# EAGLE board InkTime (EAGLE 9.7.0)
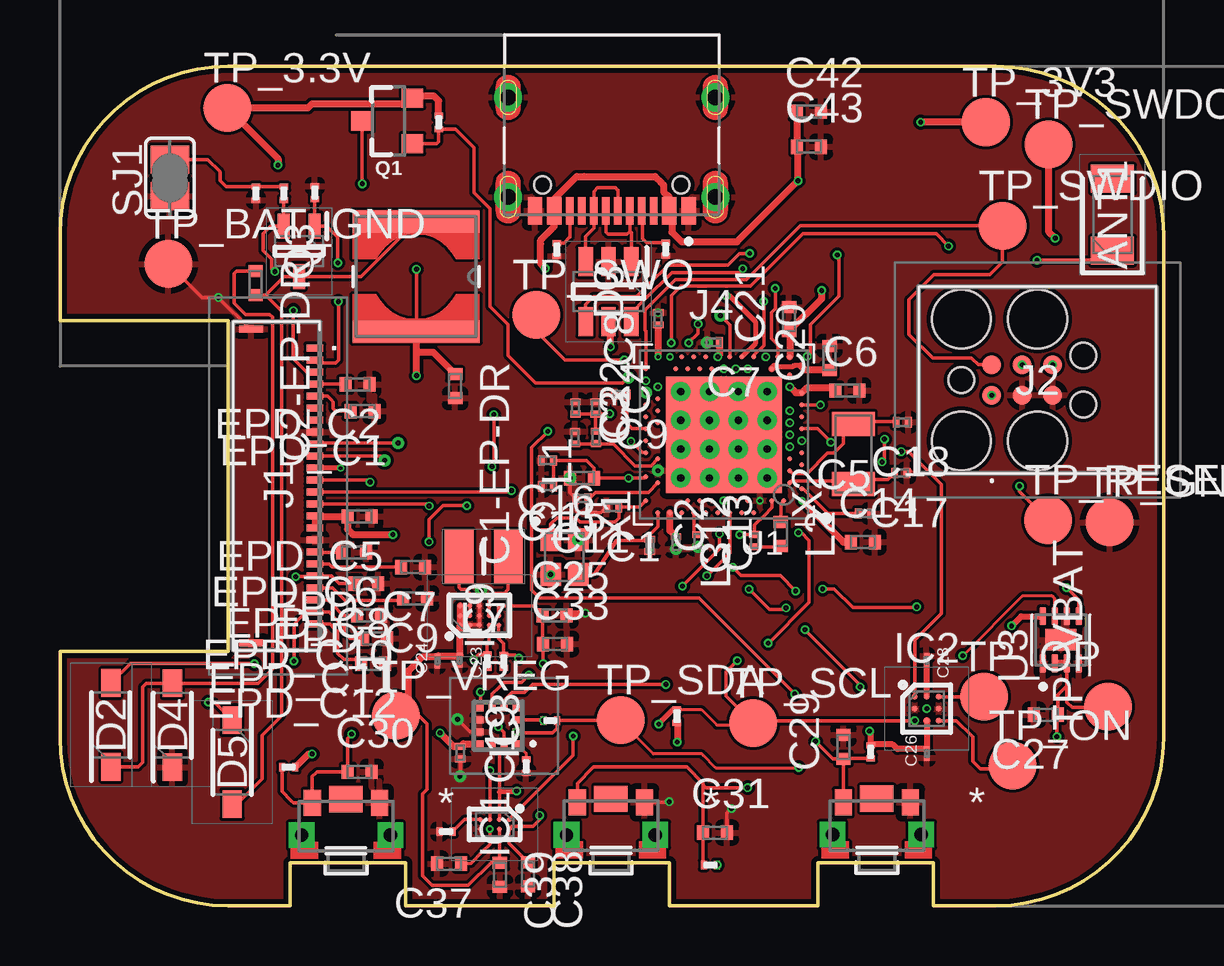
[diagram p0: board, top side]
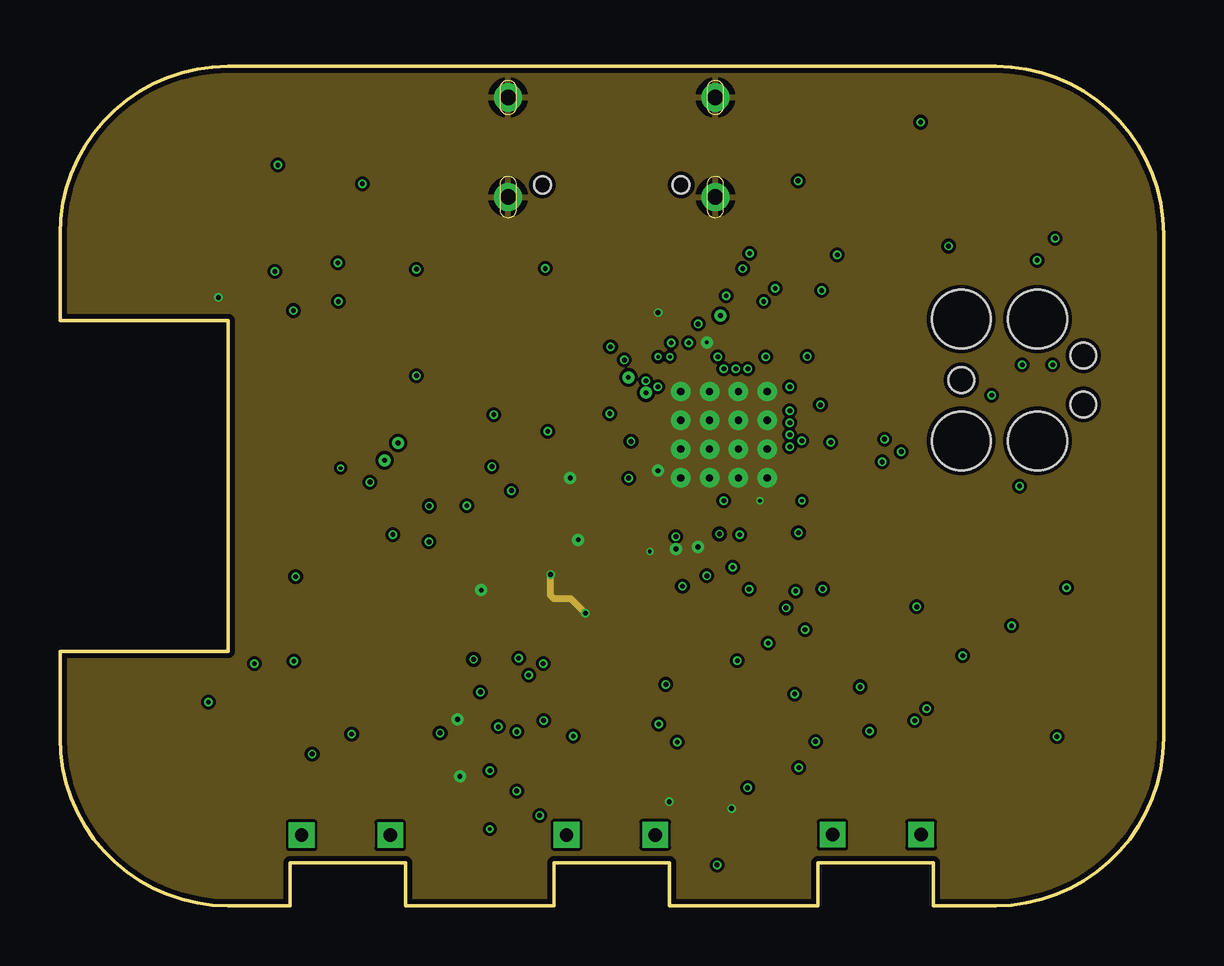
[diagram p1: board, inner layer Route2]
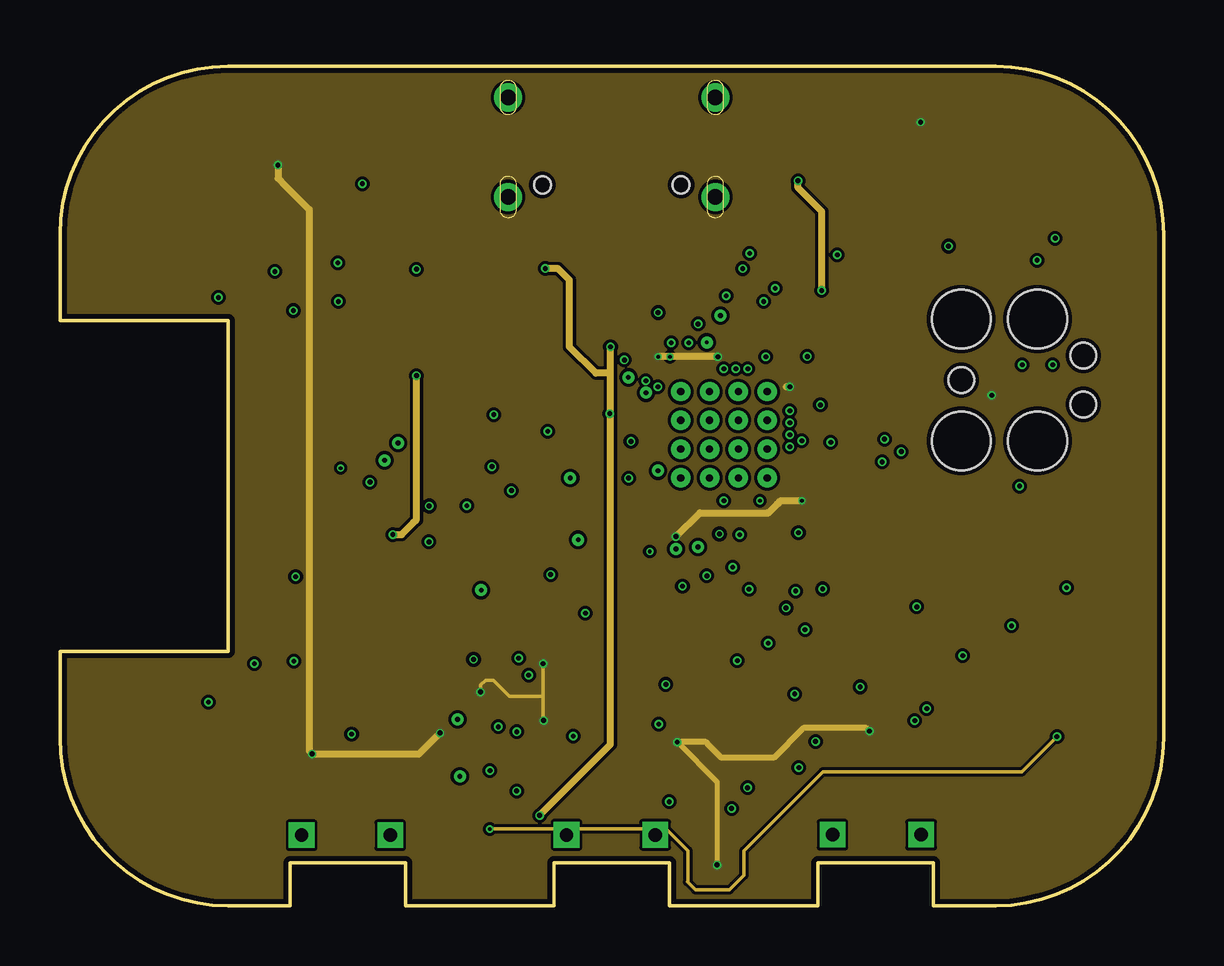
[diagram p2: board, inner layer Route15]
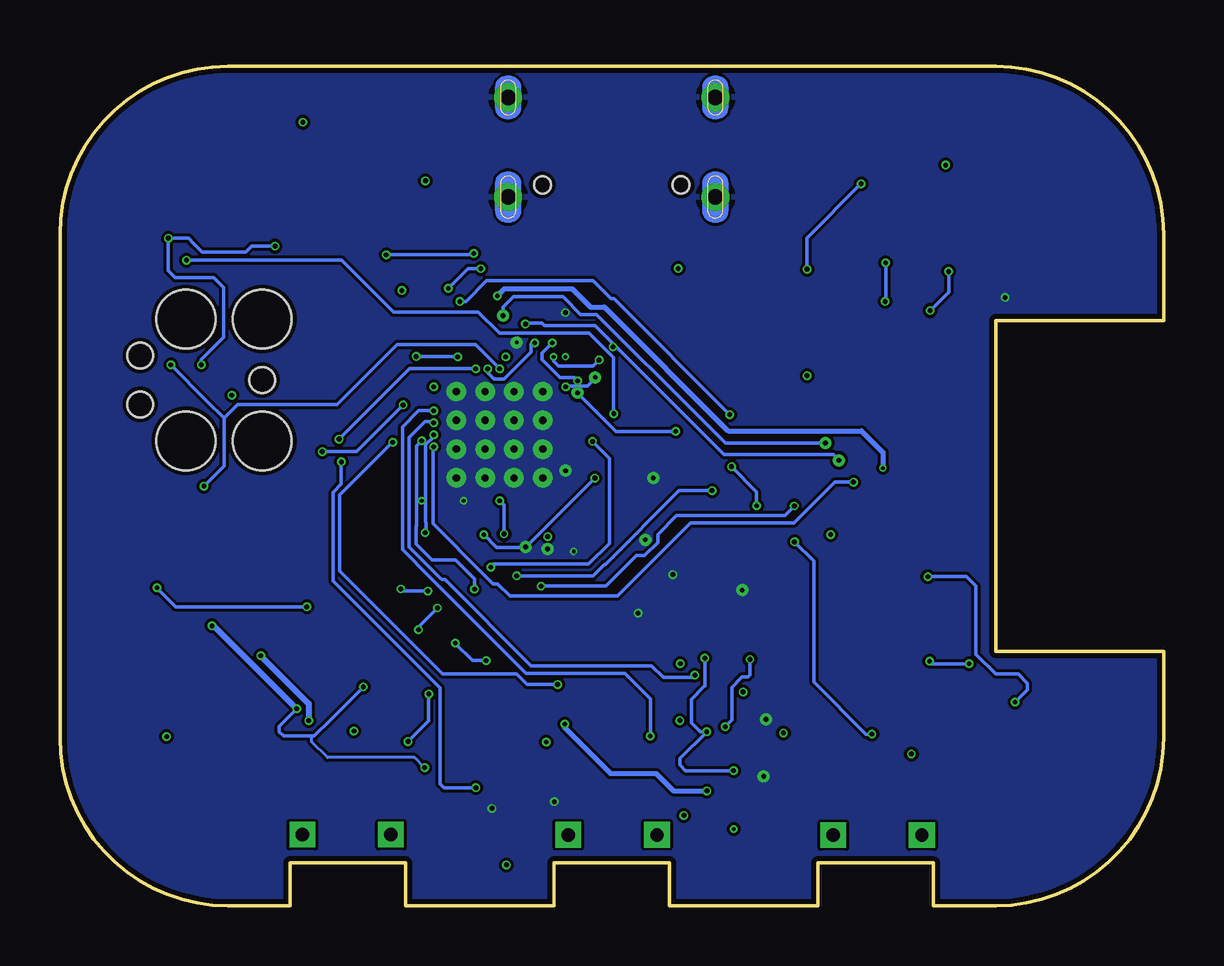
[diagram p3: board, bottom side, seen from below]

Size 46 x 35 mm. Coordinates in mm from the lower left corner, seen from the top.
Outline: 39,0 36.4,0 36.4,1.8 31.6,1.8 31.6,0 25.4,0 25.4,1.8 20.6,1.8 20.6,0 14.4,0 14.4,1.8 9.6,1.8 9.6,0 7,0 arc-90 0,7 0,10.6 7,10.6 7,24.4 0,24.4 0,28 arc-90 7,35 39,35 arc-90 46,28 46,7 arc-90 39,0
Copper layers (1+2*15+16): Top 0.035mm / dielectric 1.6mm / Route2 0.035mm / dielectric 0.15mm / Route15 0.035mm / dielectric 0.2mm / Bottom 0.035mm
Design rules "jlcpcb-2layers.dru *": minimum track width 5mil, minimum drill 0.2mm, track to track 5mil, track to pad 5mil, pad to pad 5mil, via to via 5mil, smd to smd 5mil, copper to edge 0.2mm, drill to drill 6mil, minimum pad ring 10mil, minimum via ring 3mil, stop-mask expansion 4mil, vias tented up to drill 999mm, thermal gap 10mil

## Footprints (pad centres in the part's own frame; a part is rotated, then mirrored left to right if it is on the bottom)
2450AT18B100E_ANTC3216X140N = smd 1.15 x 1.8: 1 -1.5,0; 2 1.5,0
NORDIC_NRF_3_RESC0201_L = smd 0.28 x 0.43: 1 -0.255,0; 2 0.255,0
NORDIC_NRF_3_RESC0402_L = smd 0.5 x 0.6: 1 -0.5,0; 2 0.5,0
GRM011R60J152KE01L_2_CAPC0201X13N = smd 0.22 x 0.23: 1 -0.185,0; 2 0.185,0
ESP32_C6_LIBRARY_5_SOD3716X135N = smd 1.15 x 0.8: 1 -1.75,0; 2 1.75,0
ESP32_C6_LIBRARY_3_SOT95P280X145-6N = smd 1.2 x 0.6: 1 -1.25,0.95; 2 -1.25,0; 3 -1.25,-0.95; 4 1.25,-0.95; 5 1.25,0; 6 1.25,0.95
BQ25180YBGR_BGA8C40P2X4_100X155X50 = smd 0.2 x 0.2: A1 -0.2,0.6; A2 0.2,0.6; B1 -0.2,0.2; B2 0.2,0.2; C1 -0.2,-0.2; C2 0.2,-0.2; D1 -0.2,-0.6; D2 0.2,-0.6
DRV2605YZFR_BGA9C50P3X3_144X144X62 = smd 0.25 x 0.25: A1 -0.5,0.5; A2 0,0.5; A3 0.5,0.5; B1 -0.5,0; B2 0,0; B3 0.5,0; C1 -0.5,-0.5; C2 0,-0.5; C3 0.5,-0.5
BMA423_BMA423 = smd 0.3 x 0.35: 1 -0.75,-0.775; 2 -0.25,-0.775; 3 0.25,-0.775; 4 0.75,-0.775; 7 0.75,0.775; 8 0.25,0.775; 9 -0.25,0.775; 10 -0.75,0.775 | smd 0.35 x 0.3: 5 0.775,-0.25; 6 0.775,0.25; 11 -0.775,0.25; 12 -0.775,-0.25
RT6160AWSC_BGA15C40P3X5_140X230X60 = smd 0.216 x 0.216: A1 -0.4,0.8; A2 0,0.8; A3 0.4,0.8; B1 -0.4,0.4; B2 0,0.4; B3 0.4,0.4; C1 -0.4,0; C2 0,0; C3 0.4,0; D1 -0.4,-0.4; D2 0,-0.4; D3 0.4,-0.4; E1 -0.4,-0.8; E2 0,-0.8; E3 0.4,-0.8
503480-2400_5034802400 = smd 0.3 x 0.7: 1 -5.75,1.525; 2 -5.25,1.525; 3 -4.75,1.525; 4 -4.25,1.525; 5 -3.75,1.525; 6 -3.25,1.525; 7 -2.75,1.525; 8 -2.25,1.525; 9 -1.75,1.525; 10 -1.25,1.525; 11 -0.75,1.525; 12 -0.25,1.525; 13 0.25,1.525; 14 0.75,1.525; 15 1.25,1.525; 16 1.75,1.525; 17 2.25,1.525; 18 2.75,1.525; 19 3.25,1.525; 20 3.75,1.525; 21 4.25,1.525; 22 4.75,1.525; 23 5.25,1.525; 24 5.75,1.525 | smd 0.3 x 1: MP1 -6.54,-1.125; MP2 6.54,-1.125
TC2030-IDC_TC2030IDC = smd 0.783 x 0.783: 1 -0.953,-0.635; 2 -0.953,0.635; 3 0.317,-0.635; 4 0.317,0.635; 5 1.588,-0.635; 6 1.588,0.635 | hole 2.451: -2.223,-2.54; -2.223,2.54; 0.952,-2.54; 0.952,2.54 | hole 1.067: -2.223,0; 2.857,-1.016; 2.857,1.016
KH-TYPE-C-16P_KINGHELM_KH-TYPE-C-16P = smd 0.6 x 1.15: A1_B12 -3.2,4.725; A4_B9 -2.4,4.725; A9_B4 2.4,4.725; A12_B1 3.2,4.725 | smd 0.3 x 1.15: A5 -1.25,4.725; A6 -0.25,4.725; A7 0.25,4.725; A8 1.25,4.725; B5 1.75,4.725; B6 0.75,4.725; B7 -0.75,4.725; B8 -1.75,4.725 | drill 0.65 pad 1.05: SH1 -4.32,0; SH2 4.32,0; SH3 -4.32,4.15; SH4 4.32,4.15 | hole 0.7: -2.89,3.65; 2.89,3.65
NORDIC_NRF_2_RESC0201_L = smd 0.28 x 0.43: 1 -0.255,0; 2 0.255,0
NORDIC_NRF_2_RESC0402_L = smd 0.5 x 0.6: 1 -0.5,0; 2 0.5,0
ESP32_C6_LIBRARY_2_IND_4828-WE-TPC_WRE = smd 0.9 x 5.3: 1 -2.286,0; 2 2.286,0
MLP2016SR47MT0S1_INDC2016X100N = smd 1.2 x 2.2: 1 -1.028,0; 2 1.028,0
ESP32_C6_LIBRARY_4_ESP32_C6_LIBRARY_4_ESP32_C6_LIBRARY_4_ESP32_C6_LIBRARY_4_ESP32_WROVER_SPARKFUN-DISCRETESEMI_SOT23-3 = smd 0.8 x 0.9: 1 -0.95,-1; 2 0.95,-1; 3 0,1.1
ESP32_C6_LIBRARY_6_SOT65P210X110-3N = smd 1.05 x 0.5: 1 -1.05,0.65; 2 -1.05,-0.65; 3 1.05,0
ERA-1AEB3401C_0201 = smd 0.35 x 0.25: 1 0,0.275; 2 0,-0.275
CPF0201D7K68C1_0201 = smd 0.35 x 0.25: 1 0,0.275; 2 0,-0.275
ESP32_C6_LIBRARY_7_JUMPER_SJ = smd 1.168 x 1.6: 1 -0.762,0; 2 0.762,0
2025-10-22_07-23-44_LIBRARY_SW_EVP-AKE31A_PAN = smd 0.711 x 1.092: 1 -1.4,-0.972; 2 1.4,-0.972 | drill 0.559 pad 0.914 square: 3 -1.848,0.381; 4 1.848,0.381 | smd 1.397 x 1.092: 5 0,-1.124
HECTOR_WATCH_1_TP20R = smd 2 x 2: TP 0,0
NORDIC_NRF_4_AQFN50P700X700X85_HS-74N = smd 4.85 x 4.85: P$74 0,0 | drill 0.3 pad 0.6: P$75 -1.8,1.8; P$76 -0.6,1.8; P$77 0.6,1.8; P$78 1.8,1.8; P$79 -1.8,0.6; P$80 -0.6,0.6; P$81 0.6,0.6; P$82 1.8,0.6; P$83 -1.8,-0.6; P$84 -0.6,-0.6; P$85 0.6,-0.6; P$86 1.8,-0.6; P$87 -1.8,-1.8; P$88 -0.6,-1.8; P$89 0.6,-1.8; P$90 1.8,-1.8 | smd 0.2 x 0.2: P$A8 -1.25,3.25; P$A10 -0.75,3.25; P$A12 -0.25,3.25; P$A14 0.25,3.25; P$A16 0.75,3.25; P$A18 1.25,3.25; P$A20 1.75,3.25; P$A22 2.25,3.25; P$A23 2.75,3.25; P$AA24 3.25,-2.25; P$AB2 -2.75,-2.5; P$AC5 -2,-2.75; P$AC9 -1,-2.75; P$AC11 -0.5,-2.75; P$AC13 0,-2.75; P$AC15 0.5,-2.75; P$AC17 1,-2.75; P$AC19 1.5,-2.75; P$AC21 2,-2.75; P$AC24 3.25,-2.75; P$AD2 -2.75,-3.25; P$AD4 -2.25,-3.25; P$AD6 -1.75,-3.25; P$AD8 -1.25,-3.25; P$AD10 -0.75,-3.25; P$AD12 -0.25,-3.25; P$AD14 0.25,-3.25; P$AD16 0.75,-3.25; P$AD18 1.25,-3.25; P$AD20 1.75,-3.25; P$AD22 2.25,-3.25; P$AD23 2.75,-3.25; P$B1 -3.25,2.75; P$B3 -2.5,2.75; P$B5 -2,2.75; P$B7 -1.5,2.75; P$B9 -1,2.75; P$B11 -0.5,2.75; P$B13 0,2.75; P$B15 0.5,2.75; P$B17 1,2.75; P$B19 1.5,2.75; P$B24 3.25,2.75; P$C1 -3.25,2.25; P$D2 -2.75,2; P$D23 2.75,2; P$E24 3.25,1.75; P$F2 -2.75,1.5; P$F23 2.75,1.5; P$G1 -3.25,1.25; P$H2 -2.75,1; P$H23 2.75,1; P$J1 -3.25,0.75; P$J24 3.25,0.75; P$K2 -2.75,0.5; P$L1 -3.25,0.25; P$L24 3.25,0.25; P$M2 -2.75,0; P$N1 -3.25,-0.25; P$N24 3.25,-0.25; P$P2 -2.75,-0.5; P$P23 2.75,-0.5; P$R1 -3.25,-0.75; P$R24 3.25,-0.75; P$T2 -2.75,-1; P$T23 2.75,-1; P$U1 -3.25,-1.25; P$U24 3.25,-1.25; P$V23 2.75,-1.5; P$W1 -3.25,-1.75; P$W24 3.25,-1.75; P$Y2 -2.75,-2; P$Y23 2.75,-2
ESP32_C6_LIBRARY_SON50P200X200X80-9N = smd 0.76 x 0.27: 1 -0.985,0.75; 2 -0.985,0.25; 3 -0.985,-0.25; 4 -0.985,-0.75; 5 0.985,-0.75; 6 0.985,-0.25; 7 0.985,0.25; 8 0.985,0.75 | smd 0.9 x 1.3: 9 0,0
NORDIC_NRF_BT-XTAL_2016_N = smd 0.95 x 0.85: 1 -0.725,-0.575; 2 0.725,-0.575; 3 0.725,0.575; 4 -0.725,0.575
NORDIC_NRF_1_XTAL_3215_N = smd 1 x 1.8: 1 -1.25,0; 2 1.25,0

## Placement (x,y rotation side)
ANT1  2450AT18B100E  [2450AT18B100E_ANTC3216X140N]  43.87,28.81 90 top
C1  12pF  [NORDIC_NRF_3_RESC0201_L]  23.04,16.62 180 top
C1-EP-DR  10uF  [NORDIC_NRF_3_RESC0402_L]  16.47,21.66 270 top
C2  12pF  [NORDIC_NRF_3_RESC0201_L]  24.59,15.03 270 top
C2-EP-DR  4.7uF  [NORDIC_NRF_3_RESC0402_L]  8.16,25.97 270 top
C3  1pF  [NORDIC_NRF_3_RESC0201_L]  21.47,19.51 270 top
C4  1pF  [NORDIC_NRF_3_RESC0201_L]  22.33,20.76 270 top
C5  100nF  [NORDIC_NRF_3_RESC0201_L]  33.54,16.35 0 top
C6  4.7uF  [NORDIC_NRF_3_RESC0402_L]  32.82,21.48 0 top
C7  100nF  [NORDIC_NRF_3_RESC0201_L]  27.24,23.49 180 top
C8  100nF  [NORDIC_NRF_3_RESC0201_L]  24.93,24.48 90 top
C9  820pF  [NORDIC_NRF_3_RESC0201_L]  23.38,21.31 180 top
C10  N.C.  [NORDIC_NRF_3_RESC0201_L]  20.32,17.48 180 top
C11  100pF  [NORDIC_NRF_3_RESC0201_L]  21.75,16.98 180 top
C12  100nF  [NORDIC_NRF_3_RESC0201_L]  25.68,15.14 270 top
C13  N.C.  [NORDIC_NRF_3_RESC0201_L]  26.59,15.21 270 top
C14  4.7uF  [NORDIC_NRF_3_RESC0402_L]  33.46,15.16 0 top
C15  1.0uF  [NORDIC_NRF_3_RESC0402_L]  21.77,17.83 180 top
C16  47nF  [NORDIC_NRF_3_RESC0201_L]  20.32,18.56 180 top
C17  12pF  [NORDIC_NRF_3_RESC0201_L]  35.04,18.04 180 top
C18  12pF  [NORDIC_NRF_3_RESC0201_L]  35.11,20.16 180 top
C19  100nF  [NORDIC_NRF_3_RESC0201_L]  16.69,6.38 270 top
C20  4.7uF  [NORDIC_NRF_3_RESC0402_L]  32.08,22.84 90 top
C21  4.7uF  [NORDIC_NRF_3_RESC0402_L]  30.39,24.45 90 top
C22  N.C.  [NORDIC_NRF_3_RESC0201_L]  21.49,20.76 270 top
C23  0.1uF  [GRM011R60J152KE01L_2_CAPC0201X13N]  16.66,10.24 270 top
C24  10uF  [GRM011R60J152KE01L_2_CAPC0201X13N]  15.73,10.2 90 top
C25  [NORDIC_NRF_3_RESC0402_L]  20.62,12.11 0 top
C26  0.1uF  [GRM011R60J152KE01L_2_CAPC0201X13N]  36.13,6.35 90 top
C27  0.1uF  [NORDIC_NRF_3_RESC0402_L]  41.1,7.97 180 top
C28  0.1uF  [GRM011R60J152KE01L_2_CAPC0201X13N]  36.12,10.24 270 top
C29  1uF  [NORDIC_NRF_3_RESC0402_L]  32.66,6.63 90 top
C30  1uF  [NORDIC_NRF_3_RESC0402_L]  12.49,5.58 0 top
C31  1uF  [NORDIC_NRF_3_RESC0402_L]  27.31,3.05 0 top
C33  [NORDIC_NRF_3_RESC0402_L]  20.64,10.91 0 top
C37  1uF  [NORDIC_NRF_3_RESC0402_L]  16.22,1.76 180 top
C38  1uF  [NORDIC_NRF_3_RESC0402_L]  19.51,1.32 270 top
C39  10uF  [NORDIC_NRF_3_RESC0402_L]  18.34,1.3 270 top
C42  0.1uF  [NORDIC_NRF_3_RESC0402_L]  31.22,33.1 0 top
C43  4.7uF  [NORDIC_NRF_3_RESC0402_L]  31.23,31.65 0 top
D2  ESP32_C6_LIBRARY_5_MBR0530  [ESP32_C6_LIBRARY_5_SOD3716X135N]  2.12,7.54 90 top
D3  USBLC6-2SC6Y  [ESP32_C6_LIBRARY_3_SOT95P280X145-6N]  22.86,25.61 270 top
D4  ESP32_C6_LIBRARY_5_MBR0530  [ESP32_C6_LIBRARY_5_SOD3716X135N]  4.69,7.53 90 top
D5  ESP32_C6_LIBRARY_5_MBR0530  [ESP32_C6_LIBRARY_5_SOD3716X135N]  7.17,5.99 270 top
EPD_C1  1uF/50v  [NORDIC_NRF_3_RESC0402_L]  12.61,20.62 180 top
EPD_C2  1uF/50V  [NORDIC_NRF_3_RESC0402_L]  12.4,21.74 180 top
EPD_C5  0.1uF/50V  [NORDIC_NRF_3_RESC0402_L]  12.48,16.23 180 top
EPD_C6  1uF/50V  [NORDIC_NRF_3_RESC0402_L]  12.26,14.74 180 top
EPD_C7  1uF/50V  [NORDIC_NRF_3_RESC0402_L]  14.72,14.12 180 top
EPD_C8  1uF/50V  [NORDIC_NRF_3_RESC0402_L]  12.77,13.43 180 top
EPD_C9  1uF/50V  [NORDIC_NRF_3_RESC0402_L]  14.8,12.82 180 top
EPD_C10  1uF/50V  [NORDIC_NRF_3_RESC0402_L]  12.9,12.12 180 top
EPD_C11  1uF/50V  [NORDIC_NRF_3_RESC0402_L]  13.13,11.14 180 top
EPD_C12  1uF/50V  [NORDIC_NRF_3_RESC0402_L]  13.06,10.09 180 top
IC1  BQ25180YBGR  [BQ25180YBGR_BGA8C40P2X4_100X155X50]  18.12,3.4 270 top
IC2  DRV2605YZFR  [DRV2605YZFR_BGA9C50P3X3_144X144X62]  36.13,8.22 0 top
IC3  BMA423  [BMA423_BMA423]  18.27,7.51 90 top
IC9  RT6160AWSC  [RT6160AWSC_BGA15C40P3X5_140X230X60]  17.49,12.1 90 top
J1  503480-2400  [503480-2400_5034802400]  9.1,17.5 270 top
J2  TC2030-IDC  [TC2030-IDC_TC2030IDC]  39.79,21.92 0 top
J4  KH-TYPE-C-16P  [KH-TYPE-C-16P_KINGHELM_KH-TYPE-C-16P]  23,33.7 180 top
L1  3.9nH  [NORDIC_NRF_2_RESC0201_L]  22.34,19.53 90 top
L2  10uH  [NORDIC_NRF_2_RESC0402_L]  30.05,15.49 270 top
L3  15nH  [NORDIC_NRF_2_RESC0201_L]  28.96,15.22 90 top
L5  68uH  [ESP32_C6_LIBRARY_2_IND_4828-WE-TPC_WRE]  14.84,26.23 270 top
L7  FTC252012SR47MBCA  [MLP2016SR47MT0S1_INDC2016X100N]  17.66,14.57 0 top
Q1  20V/4.2A/52mΩ/1.4W  [ESP32_C6_LIBRARY_4_ESP32_C6_LIBRARY_4_ESP32_C6_LIBRARY_4_ESP32_C6_LIBRARY_4_ESP32_WROVER_SPARKFUN-DISCRETESEMI_SOT23-3]  13.7,32.72 90 top
Q3  SI1308EDL-T1-GE3  [ESP32_C6_LIBRARY_6_SOT65P210X110-3N]  9.97,27.29 270 top
R1_EP_DR  0.47  [ERA-1AEB3401C_0201]  9.34,29.7 0 top
R1_USB  CPF0201D7K68C1_CPF0201D7K68C1  [CPF0201D7K68C1_0201]  25.24,27.37 180 top
R2  CPF0201D7K68C1_CPF0201D7K68C1  [CPF0201D7K68C1_0201]  18.49,10.19 180 top
R2_EP_DR  10K  [ERA-1AEB3401C_0201]  10.62,29.73 0 top
R2_USB  5k1  [CPF0201D7K68C1_0201]  20.7,27.36 0 top
R3  CPF0201D7K68C1_CPF0201D7K68C1  [CPF0201D7K68C1_0201]  19.43,5.82 180 top
R4  0  [CPF0201D7K68C1_0201]  17.81,10.2 180 top
R5  10K  [CPF0201D7K68C1_0201]  9.53,5.78 90 top
R7  10K  [CPF0201D7K68C1_0201]  33.8,6.42 180 top
R8  10K  [CPF0201D7K68C1_0201]  27.11,1.71 90 top
R9  10K  [CPF0201D7K68C1_0201]  16.09,3.1 90 top
R17  3K3  [CPF0201D7K68C1_0201]  25.72,7.91 180 top
R18  3K3  [CPF0201D7K68C1_0201]  20.44,7.73 90 top
R_PWR_EPD  CPF0201D7K68C1_CPF0201D7K68C1  [CPF0201D7K68C1_0201]  15.79,32.66 180 top
R_TYPE_SEL  2.2  [ERA-1AEB3401C_0201]  8.17,29.7 180 top
SJ1  [ESP32_C6_LIBRARY_7_JUMPER_SJ]  4.58,30.34 90 top
SW_DN  2025-10-22_07-23-44_LIBRARY_EVP-AKE31ASW_EVP-AKE31A_PAN  [2025-10-22_07-23-44_LIBRARY_SW_EVP-AKE31A_PAN]  34.05,3.35 180 top
SW_ENT  2025-10-22_07-23-44_LIBRARY_EVP-AKE31ASW_EVP-AKE31A_PAN  [2025-10-22_07-23-44_LIBRARY_SW_EVP-AKE31A_PAN]  22.96,3.34 180 top
SW_UP  2025-10-22_07-23-44_LIBRARY_EVP-AKE31ASW_EVP-AKE31A_PAN  [2025-10-22_07-23-44_LIBRARY_SW_EVP-AKE31A_PAN]  11.92,3.32 180 top
TP_3.3V  HECTOR_WATCH_1_TPTP20R  [HECTOR_WATCH_1_TP20R]  6.97,33.26 0 top
TP_3V3  HECTOR_WATCH_1_TPTP20R  [HECTOR_WATCH_1_TP20R]  38.59,32.67 0 top
TP_BAT_GND  HECTOR_WATCH_1_TPTP20R  [HECTOR_WATCH_1_TP20R]  4.52,26.75 0 top
TP_GND  HECTOR_WATCH_1_TPTP20R  [HECTOR_WATCH_1_TP20R]  43.75,15.99 0 top
TP_ON  HECTOR_WATCH_1_TPTP20R  [HECTOR_WATCH_1_TP20R]  39.71,5.84 0 top
TP_OP  HECTOR_WATCH_1_TPTP20R  [HECTOR_WATCH_1_TP20R]  38.52,8.72 0 top
TP_RESET  HECTOR_WATCH_1_TPTP20R  [HECTOR_WATCH_1_TP20R]  41.2,16.08 0 top
TP_SCL  HECTOR_WATCH_1_TPTP20R  [HECTOR_WATCH_1_TP20R]  28.89,7.61 0 top
TP_SDA  HECTOR_WATCH_1_TPTP20R  [HECTOR_WATCH_1_TP20R]  23.38,7.74 0 top
TP_SWDCLK  HECTOR_WATCH_1_TPTP20R  [HECTOR_WATCH_1_TP20R]  41.2,31.74 0 top
TP_SWDIO  HECTOR_WATCH_1_TPTP20R  [HECTOR_WATCH_1_TP20R]  39.29,28.35 0 top
TP_SWO  HECTOR_WATCH_1_TPTP20R  [HECTOR_WATCH_1_TP20R]  19.85,24.63 0 top
TP_VBAT  HECTOR_WATCH_1_TPTP20R  [HECTOR_WATCH_1_TP20R]  43.69,8.3 90 top
TP_VREG  HECTOR_WATCH_1_TPTP20R  [HECTOR_WATCH_1_TP20R]  14,7.92 0 top
U1  NRF52840_QF  [NORDIC_NRF_4_AQFN50P700X700X85_HS-74N]  27.68,19.64 180 top
U3  MAX17048G+T10  [ESP32_C6_LIBRARY_SON50P200X200X80-9N]  41.72,11.09 90 top
X1  32MHz  [NORDIC_NRF_BT-XTAL_2016_N]  21.03,14.54 270 top
X2  32.768kHz  [NORDIC_NRF_1_XTAL_3215_N]  33.07,18.84 90 top

## Library data of the parts
ANT1 = InkTime_v5; ARROW_PART_NUMBER: 2450AT18B100E; ARROW_PRICE-STOCK: https://www.arrow.com/en/products/2450at18b100e/johanson-dielectrics?utm_currency=USD&region=nac; DESCRIPTION: Antennas 2.45GHz ANTENNA; HEIGHT: 1.4mm; MANUFACTURER_NAME: JOHANSON TECHNOLOGY; MANUFACTURER_PART_NUMBER: 2450AT18B100E; MOUSER_PART_NUMBER: 609-2450AT18B100E; MOUSER_PRICE-STOCK: https://www.mouser.co.uk/ProductDetail/Johanson-Technology/2450AT18B100E?qs=yCnrNFeXz%252Bh5MFsFIXGZGA%3D%3D
C1 C1-EP-DR C2 C2-EP-DR C3-C22 C25 C27 C29-C31 C33 C37-C39 C42 C43 EPD_C1 EPD_C2 EPD_C5-EPD_C12 L1-L3 R1_EP_DR R1_USB R2 R2_EP_DR R2_USB R3-R5 R7-R9 R17 R18 R_PWR_EPD R_TYPE_SEL SJ1 TP_3.3V TP_3V3 TP_BAT_GND TP_GND TP_ON TP_OP TP_RESET TP_SCL TP_SDA TP_SWDCLK TP_SWDIO TP_SWO TP_VBAT TP_VREG U1 X1 X2 = InkTime_v5
C23 C24 C26 C28 = InkTime_v5; AVAILABILITY: In Stock; CHECK_PRICES: https://www.snapeda.com/parts/GRM011R60J152KE01L/Murata/view-part/?ref=eda; DESCRIPTION: SMD Capacitor X5R(EIA) with Capacitance: 1500pF Tol. 10%. Rated Voltage: 6.3Vdc; MF: Murata; MP: GRM011R60J152KE01L; PACKAGE: 0201 Murata; PRICE: None; SNAPEDA_LINK: https://www.snapeda.com/parts/GRM011R60J152KE01L/Murata/view-part/?ref=snap
D2 D4 D5 = InkTime_v5; AVAILABILITY: In Stock; CHECK_PRICES: https://www.snapeda.com/parts/MBR0530/Onsemi/view-part/?ref=eda; DESCRIPTION: Diode Schottky 30 V 500mA Surface Mount SOD-123; MF: ON Semiconductor; MP: MBR0530; PACKAGE: SOD-123-2 ON Semiconductor; PRICE: None; PURCHASE-URL: https://www.snapeda.com/api/url_track_click_mouser/?unipart_id=179458&manufacturer=ON Semiconductor&part_name=MBR0530&search_term=None; SNAPEDA_LINK: https://www.snapeda.com/parts/MBR0530/Onsemi/view-part/?ref=snap
D3 = InkTime_v5; AVAILABILITY: In Stock; CHECK_PRICES: https://www.snapeda.com/parts/USBLC6-2SC6Y/STMicroelectronics/view-part/?ref=eda; DESCRIPTION: 17V Clamp 5A (8/20µs) Ipp Tvs Diode Surface Mount SOT-23-6; MF: STMicroelectronics; MP: USBLC6-2SC6Y; PACKAGE: SOT-23-6 STMicroelectronics; PRICE: None; SNAPEDA_LINK: https://www.snapeda.com/parts/USBLC6-2SC6Y/STMicroelectronics/view-part/?ref=snap
IC1 = InkTime_v5; ARROW_PART_NUMBER: BQ25180YBGR; ARROW_PRICE-STOCK: https://www.arrow.com/en/products/bq25180ybgr/texas-instruments?utm_currency=USD&region=nac; DESCRIPTION: Charger IC Lithium Ion/Polymer, Lithium Iron Phosphate 8-DSBGA (1.6x1.1); HEIGHT: 0.5mm; MANUFACTURER_NAME: Texas Instruments; MANUFACTURER_PART_NUMBER: BQ25180YBGR; MOUSER_PART_NUMBER: 595-BQ25180YBGR; MOUSER_PRICE-STOCK: https://www.mouser.co.uk/ProductDetail/Texas-Instruments/BQ25180YBGR?qs=doiCPypUmgEWjAK%252BJAX6Tw%3D%3D
IC2 = InkTime_v5; ARROW_PART_NUMBER: DRV2605YZFR; ARROW_PRICE-STOCK: https://www.arrow.com/en/products/drv2605yzfr/texas-instruments?region=nac; DESCRIPTION: Haptic Driver for ERM/LRA with Built-In Library and Smart Loop Architecture; HEIGHT: 0.625mm; MANUFACTURER_NAME: Texas Instruments; MANUFACTURER_PART_NUMBER: DRV2605YZFR
IC3 = InkTime_v5; ARROW_PART_NUMBER: BMA423; ARROW_PRICE-STOCK: https://www.arrow.com/en/products/bma423/bosch; DESCRIPTION: Accelerometers Triaxial low-g 12bit Acceleration Sensor; HEIGHT: 1mm; MANUFACTURER_NAME: BOSCH; MANUFACTURER_PART_NUMBER: BMA423; MOUSER_PART_NUMBER: 262-BMA423; MOUSER_PRICE-STOCK: https://www.mouser.co.uk/ProductDetail/Bosch-Sensortec/BMA423?qs=HXFqYaX1Q2xC%252BSgeGoX3mg%3D%3D
IC9 = InkTime_v5; DESCRIPTION: Buck-Boost Regulator Positive Output Step-Up/Step-Down I2C DC-DC Controller IC 15-WL-CSP (BSC) (1.4x2.3); HEIGHT: 0.6mm; MANUFACTURER_NAME: RICHTEK; MANUFACTURER_PART_NUMBER: RT6160AWSC; MOUSER_PART_NUMBER: 835-RT6160AWSC; MOUSER_PRICE-STOCK: https://www.mouser.co.uk/ProductDetail/Richtek/RT6160AWSC?qs=amGC7iS6iy%2FLd9PSoixZXQ%3D%3D
J1 = InkTime_v5; DESCRIPTION: FFC & FPC Connectors 0.5mm FPC RA SMT Dual Contact 24Ckt; HEIGHT: 1.87mm; MANUFACTURER_NAME: Molex; MANUFACTURER_PART_NUMBER: 503480-2400; MOUSER_PART_NUMBER: 538-503480-2400; MOUSER_PRICE-STOCK: https://www.mouser.co.uk/ProductDetail/Molex/503480-2400?qs=OAhjpuo3Vu7efIoxFh9AOw%3D%3D
J2 = InkTime_v5; DESCRIPTION: CABLE ADAPTER 6 POS; HEIGHT: 19mm; MANUFACTURER_NAME: Tag Connect; MANUFACTURER_PART_NUMBER: TC2030-IDC
J4 = InkTime_v5; AVAILABILITY: Not in stock; CHECK_PRICES: https://www.snapeda.com/parts/KH-TYPE-C-16P/Kinghelm/view-part/?ref=eda; MF: kinghelm; MP: KH-TYPE-C-16P; PACKAGE: None; PRICE: None; SNAPEDA_LINK: https://www.snapeda.com/parts/KH-TYPE-C-16P/Kinghelm/view-part/?ref=snap
L5 = InkTime_v5; COPYRIGHT: Copyright (C) 2024 Ultra Librarian. All rights reserved.; MANUFACTURER_PART_NUMBER: 744043680; MFR_NAME: Wurth Electronics
L7 = InkTime_v5; DESCRIPTION: SMD / SMT Inductors (Coils), L=0.47?H, L x W x T :; HEIGHT: 1mm; JLCPCB: https://jlcpcb.com/partdetail/6763488-FTC252012SR47MBCA/C5832368; MANUFACTURER_NAME: TDK; MANUFACTURER_PART_NUMBER: FTC252012SR47MBCA
Q1 = InkTime_v5; PROD_ID: TRAN-14388
Q3 = InkTime_v5; AVAILABILITY: In Stock; CHECK_PRICES: https://www.snapeda.com/parts/SI1308EDL-T1-GE3/Vishay+Siliconix/view-part/?ref=eda; DESCRIPTION: Si1308EDL-T1-GE3 N-channel MOSFET Transistor, 1.5 A, 30 V, 3-Pin SC-70 | Siliconix / Vishay SI1308EDL-T1-GE3; MF: Vishay Siliconix; MP: SI1308EDL-T1-GE3; PACKAGE: SOT-323 Vishay Semiconductor; PRICE: None; PURCHASE-URL: https://www.snapeda.com/api/url_track_click_mouser/?unipart_id=274603&manufacturer=Vishay Siliconix&part_name=SI1308EDL-T1-GE3&search_term=None; SNAPEDA_LINK: https://www.snapeda.com/parts/SI1308EDL-T1-GE3/Vishay+Siliconix/view-part/?ref=snap
SW_DN SW_ENT SW_UP = InkTime_v5; COPYRIGHT: Copyright (C) 2025 Ultra Librarian. All rights reserved.; DIGI-KEY_PART_NUMBER_1: P123437TR-ND; DIGI-KEY_PART_NUMBER_2: P123437CT-ND; DIGI-KEY_PART_NUMBER_3: P123437DKR-ND; MANUFACTURER_NAME: Panasonic; MANUFACTURER_PART_NUMBER: EVP-AKE31A
U3 = InkTime_v5; AVAILABILITY: In Stock; CHECK_PRICES: https://www.snapeda.com/parts/MAX17048G+T10/Analog+Devices/view-part/?ref=eda; DESCRIPTION: 3µA 1-Cell/2-Cell Fuel Gauge with ModelGauge; MF: Analog Devices; MP: MAX17048G+T10; PACKAGE: TDFN-8 Maxim; PRICE: None; PURCHASE-URL: https://www.snapeda.com/api/url_track_click_mouser/?unipart_id=329239&manufacturer=Analog Devices&part_name=MAX17048G+T10&search_term=None; SNAPEDA_LINK: https://www.snapeda.com/parts/MAX17048G+T10/Analog+Devices/view-part/?ref=snap

## Nets
3V3: C6.1 C7.1 C8.1 C12.1 C14.1 C19.1 C25.1 C26.2 C33.1 IC2.C2 IC3.3 IC3.7 IC3.10 IC9.E2 IC9.E3 J2.1 Q1.2 R5.2 R7.2 R8.2 R17.1 R18.1 R_PWR_EPD.2 TP_3.3V.TP TP_3V3.TP U1.P$A22 U1.P$AD14 U1.P$AD23 U1.P$B1 U1.P$W1 U1.P$Y2
ALERT: U1.P$J24 U3.5
D+: D3.4 U1.P$AD6
D-: D3.6 U1.P$AD4
DEC1@C1: C5.1 U1.P$C1
DEC3@D23: C11.1 U1.P$D23
DEC3V3@AC5: C20.1 U1.P$AC5
DEC5@N24: C9.1 U1.P$N24
DN: D3.1 J4.A7 J4.B7
DP: D3.3 J4.A6 J4.B6
EPD_3V3: C1-EP-DR.1 EPD_C5.2 J1.15 J1.16 L5.2 Q1.3
EPD_BUSY: J1.9 U1.P$AD12
EPD_CS: J1.12 U1.P$K2
EPD_DC: J1.11 U1.P$AD10
EPD_RST: J1.10 U1.P$AC11
GDR: J1.2 Q3.1 R2_EP_DR.2
GND: C1-EP-DR.2 C1.2 C2.2 C3.1 C4.1 C5.2 C6.2 C7.2 C8.2 C9.2 C10.2 C11.2 C12.2 C13.2 C14.2 C15.2 C16.2 C17.1 C18.1 C19.2 C20.2 C21.2 C22.1 C23.2 C24.1 C25.2 C26.1 C27.2 C28.1 C29.2 C30.2 C31.2 C33.2 C37.2 C38.2 C39.2 C42.2 C43.2 D3.2 D4.1 EPD_C1.1 EPD_C2.1 EPD_C5.1 EPD_C6.1 EPD_C7.1 EPD_C8.1 EPD_C9.1 EPD_C10.1 EPD_C11.1 EPD_C12.1 IC1.D2 IC2.B1 IC2.B3 IC3.8 IC3.9 IC9.B1 IC9.C1 IC9.C2 IC9.C3 J1.8 J1.17 J1.MP1 J1.MP2 J2.3 J2.5 J4.A1_B12 J4.A12_B1 J4.SH1 J4.SH2 J4.SH3 J4.SH4 R1_USB.1 R2_EP_DR.1 R2_USB.2 R3.1 R9.1 R_TYPE_SEL.1 SJ1.1 SW_DN.1 SW_ENT.1 SW_UP.1 TP_BAT_GND.TP TP_GND.TP U1.P$74 U1.P$75 U1.P$76 U1.P$77 U1.P$78 U1.P$79 U1.P$80 U1.P$81 U1.P$82 U1.P$83 U1.P$84 U1.P$85 U1.P$86 U1.P$87 U1.P$88 U1.P$89 U1.P$90 U1.P$B7 U1.P$F23 U3.1 U3.4 U3.6 U3.9 X1.2 X1.4
HAPTIC_EN: IC2.A1 U1.P$U1
IMU_INT1: IC3.5 U1.P$N1
IMU_INT2: IC3.6 U1.P$P2
LX1: IC9.B2 IC9.B3 L7.1
LX2: IC9.D2 IC9.D3 L7.2
MOSI: J1.14 U1.P$B13
N$1: L2.2 L3.1
N$2: L2.1 U1.P$B3
N$3: C10.1 C15.1 C16.1 L3.2 U1.P$B5 U1.P$E24
N$4: C13.1 U1.P$A18
N$5: C3.2 L1.1 U1.P$H23
N$6: ANT1.1 C4.2 C22.2 L1.2
N$7: IC1.D1 R9.2
N$8: R4.1
N$9: R2.1
N$13: IC3.1 R3.2
N$26: R1_EP_DR.1 R_TYPE_SEL.2 SJ1.2
N$31: C2-EP-DR.1 D2.1 D4.2
N$32: C2-EP-DR.2 D5.2 L5.1 Q3.3
N$38: EPD_C2.2 J1.4
N$39: EPD_C1.2 J1.5
N$41: EPD_C6.2 J1.18
N$42: EPD_C7.2 J1.19
N$44: EPD_C9.2 J1.21
N$45: EPD_C10.2 J1.22
N$47: EPD_C12.2 J1.24
N$48: J1.1
N$63: C28.2 IC2.A2
N$75: J4.A5 R1_USB.2
N$76: J4.B5 R2_USB.1
OUT+: IC2.A3 TP_OP.TP
OUT-: IC2.C3 TP_ON.TP
P0.00/XL1@D2: C17.2 U1.P$D2 X2.1
P0.01/XL2@F2: C18.2 U1.P$F2 X2.2
P0.04: U1.P$J1
P0.09: U1.P$L24
P0.13: C30.1 R5.1 SW_UP.2 U1.P$AD8
P0.14: C31.1 R8.1 SW_ENT.2 U1.P$AC9
P0.19: U1.P$AC15
P0.20: U1.P$AD16
P0.21: U1.P$AC17
P0.22: U1.P$AD18
P0.23: U1.P$AC19
P0.24: U1.P$AD20
P0.25: U1.P$AC21
P0.26: U1.P$G1
P0.27: U1.P$H2
P0.28: U1.P$B11
P0.29: U1.P$A10
P0.30: U1.P$B9
P0.31: U1.P$A8
P1.01: Q1.1 R_PWR_EPD.1 U1.P$Y23
P1.02: C29.1 R7.1 SW_DN.2 U1.P$W24
P1.03: U1.P$V23
P1.04: U1.P$U24
P1.05: U1.P$T23
P1.06: U1.P$R24
P1.07: U1.P$P23
P1.09: U1.P$R1
P1.10: U1.P$A20
P1.11: U1.P$B19
P1.12: U1.P$B17
P1.13: U1.P$A16
P1.14: U1.P$B15
P1.15: U1.P$A14
PMIC_INT: IC1.A1 U1.P$T2
PREVGH: D5.1 EPD_C8.2 J1.20
PREVGL: D2.2 EPD_C11.2 J1.23
RESE: J1.3 Q3.2 R1_EP_DR.2
RESET: J2.6 TP_RESET.TP U1.P$AC13
SCK: J1.13 U1.P$A12
SCL: IC1.B1 IC2.C1 IC3.12 IC9.D1 R4.2 R17.2 TP_SCL.TP U1.P$M2 U3.7
SDA: IC1.C1 IC2.B2 IC3.2 IC9.E1 R2.2 R18.2 TP_SDA.TP U1.P$L1 U3.8
SWDCLK: J2.4 TP_SWDCLK.TP U1.P$AA24
SWDIO: J2.2 TP_SWDIO.TP U1.P$AC24
SWO: TP_SWO.TP U1.P$AD22
VBAT: C27.1 C37.1 IC1.C2 TP_VBAT.TP U3.2 U3.3
VBUS: C21.1 C38.1 C42.1 C43.1 D3.5 IC1.A2 J4.A4_B9 J4.A9_B4 U1.P$AD2
VREG: C23.1 C24.2 C39.1 IC1.B2 IC9.A1 IC9.A2 IC9.A3 TP_VREG.TP
XC1@B24: C1.1 U1.P$B24 X1.1
XC2@A23: C2.1 U1.P$A23 X1.3

## Tracks (layer width: path | path; a pad name or v marks a point on that pad's centre or on a via)
3V3  (via drill 0.15 pad 0.15, 0.2, 0.2 pad 0.15)
  Top 0.127: R17.1 25.75,7.6 R17.1
  Top 0.15: IC9.E2 IC9.E3 19.73,12.5 C25.1 20.12,10.93 C33.1 | C33.1 20.16,10.89 | C33.1 v20.14,10.09 | IC3.3 20.13,7.76 R18.1 | v17.53,8.91 17.53,8.29 IC3.7
  Top 0.203: 25.75,6.84 v25.73,6.82
  Top 0.254: IC2.C2 C26.2 34.91,6.53 34.72,6.73 33.83,6.73 R7.2 33.8,7.23 v33.74,7.28
  Top 0.3: C8.1 U1.P$AD23 | U1.P$B1 32.65,15.16 C14.1 | C12.1 25.43,15.64 U1.P$A22 | C7.1 27.49,22.95 U1.P$AD14 | U1.P$Y2 30.68,21.39 U1.P$W1 31.14,21.6 32.32,21.6 C6.1 | R5.2 10.36,6.33 v10.51,6.33 | v15.84,7.21 16.41,6.64 C19.1 16.81,6.76 IC3.10 | 25.75,7.6 25.75,6.84 | R_PWR_EPD.2 15.79,33.55 15.59,33.75 14.78,33.75 | 14.78,33.75 Q1.2 | 14.78,33.75 14.44,33.42 10.49,33.42 10.34,33.26 TP_3.3V.TP 9.08,31.15 v9.08,30.88 | TP_3V3.TP v35.87,32.67
  Top 0.305: IC2.C2
  Route15 0.15: v20.14,10.09 20.14,8.72 | 20.14,8.72 20.14,8.61 20.14,7.75 R18.1 | 20.14,8.72 18.75,8.72 18.07,9.4 17.73,9.4 17.54,9.21 17.53,9.2 v17.53,8.91
  Route15 0.203: v25.73,6.82 27.39,5.17 R8.2
  Route15 0.254: v33.74,7.28 33.61,7.41 30.99,7.41 29.75,6.17 27.57,6.17 27.06,6.69 26.92,6.82 v25.73,6.82
  Route15 0.3: U1.P$AD14 U1.P$AD23 | v15.84,7.21 14.97,6.33 v10.51,6.33 10.39,6.46 10.39,20.57 10.39,29.02 9.41,30 9.08,30.33 v9.08,30.88 | U1.P$Y2 30.28,21.64 | C12.1 26.67,16.38 29.48,16.38 29.53,16.38 29.9,16.75 30.04,16.89 U1.P$B1
  other vias: 27.43,22.89 24.93,22.89 27.39,1.71 20.16,7.73 30.43,21.64 25.68,15.39 30.93,16.89 38.84,21.28
  pour Route15: 25.45,1.75 25.45,0.03 31.53,0.05 31.59,1.81 31.59,1.82 31.59,1.82 31.59,1.82 31.6,1.83 31.61,1.84 31.61,1.84 31.61,1.84 31.62,1.84 36.4,1.82 36.42,1.82 36.42,1.82 36.42,1.82 36.43,1.81 36.44,1.8 36.44,1.8 36.44,1.8 36.44,1.79 36.46,0.07 39.92,0.05 40.74,0.23 41.54,0.49 42.3,0.86 43.01,1.31 43.67,1.84 44.25,2.44 44.76,3.11 45.19,3.84 45.53,4.61 45.78,5.41 45.92,6.24 45.97,7.09 45.92,28.74 45.86,29.5 45.7,30.25 45.47,30.97 45.14,31.66 44.74,32.31 44.26,32.9 43.71,33.44 43.11,33.9 42.45,34.29 41.76,34.6 41.03,34.82 40.28,34.96 39.51,35 6.38,34.94 5.62,34.91 4.88,34.79 4.15,34.57 3.46,34.27 2.81,33.89 2.21,33.43 1.67,32.9 1.19,32.31 0.79,31.67 0.48,30.98 0.25,30.26 0.11,29.52 0.05,28.77 0.03,24.47 7,24.45 7.02,24.45 7.02,24.45 7.02,24.45 7.03,24.44 7.04,24.43 7.04,24.43 7.04,24.43 7.04,24.41 7.04,10.6 7.04,10.59 7.04,10.59 7.04,10.59 7.03,10.58 7.02,10.57 7.02,10.57 7.02,10.57 7,10.57 0.02,10.52 0.01,6.65 0.01,5.87 0.11,5.1 0.3,4.35 0.59,3.63 0.96,2.95 1.42,2.32 1.95,1.75 2.55,1.26 3.2,0.84 3.9,0.51 4.64,0.27 5.4,0.13 6.18,0.08 9.53,0.08 9.56,1.79 9.56,1.81 9.56,1.81 9.56,1.81 9.57,1.82 9.58,1.83 9.58,1.83 9.58,1.83 9.6,1.83 14.37,1.83 14.37,1.83 14.39,1.83 14.4,1.83 14.4,1.83 14.4,1.83 14.41,1.82 14.43,1.81 14.43,1.81 14.43,1.81 14.43,1.79 14.43,1.78 14.43,1.78 14.41,0.15 20.58,0.06 20.52,1.77 20.52,1.77 20.52,1.78 20.52,1.8 20.52,1.8 20.52,1.8 20.53,1.81 20.54,1.82 20.54,1.82 20.54,1.82 20.56,1.82 20.57,1.82 20.57,1.82 25.41,1.79 25.43,1.79 25.43,1.79 25.43,1.79 25.44,1.78 25.45,1.77 25.45,1.77 25.45,1.77
ALERT  (via drill 0.2)
  Top 0.15: U1.P$J24 24.27,18.89 v23.8,19.36 | v28.04,14.11 28.39,13.76 29.26,13.76 29.27,13.76 30.02,13.76 v30.66,13.12 | v35.72,12.47 35.69,12.43 33.04,12.43 32.27,13.21 v31.79,13.21 | v41.96,13.26 42.47,12.75 U3.5
  Bottom 0.15: v23.8,19.36 23.09,18.65 23.09,17.95 23.09,15.11 23.96,14.24 27.92,14.24 v28.04,14.11 | v41.96,13.26 41.17,12.47 v35.72,12.47 | v30.66,13.12 31.7,13.12 v31.79,13.21
D+  (via drill 0.2)
  Top 0.15: v31.16,22.9 31.27,23.02 31.27,24.23 32.34,25.3 32.46,25.42 32.46,27.07 32.46,27.08 v32.4,27.14 | v28.75,27.2 28.33,27.2 27.9,26.77 27.84,26.71 26.52,26.71 25.36,26.71 24.56,25.91 24.04,25.39 22.25,25.39 21.91,25.06 D3.4
  Bottom 0.15: U1.P$AD6 31.14,22.89 v31.16,22.9 | v32.4,27.14 28.81,27.14 v28.75,27.2
  other vias: 29.43,22.89
D-  (via drill 0.2)
  Top 0.15: 23.81,24.73 D3.6 23.81,24.71 24.39,25.29 25.5,26.4 26.25,26.4 28.3,26.4 v28.46,26.56 | U1.P$AD4 29.93,23.38 29.65,23.65 29.65,24.73 29.8,24.88 29.82,24.89 v29.82,25.74
  Bottom 0.15: v29.82,25.74 29.09,26.47 28.99,26.56 v28.46,26.56
DEC1@C1
  Top 0.15: U1.P$C1 30.97,17.39 32.01,16.35 C5.1
DEC3@D23
  Top 0.15: C11.1 22.03,16.96 22.03,16.94 22.04,16.94 22.29,17.2 22.33,17.23 24.05,17.23 24.52,17.23 U1.P$D23
DEC3V3@AC5
  Top 0.2: 29.77,22.48 30.56,22.48 30.59,22.51
  Top 0.203: 30.87,22.51 30.59,22.51
  Top 0.3: C20.1 31.05,22.34 30.91,22.47 30.87,22.51 | 29.77,22.48 U1.P$AC5
DEC5@N24
  Top 0.15: U1.P$N24 23.85,19.89 23.64,20.1 C9.1
DN
  Top 0.15: D3.1 23.81,28.05 23.75,28.12 | 23.75,28.12 J4.B7 | J4.A7 22.75,28.09 22.84,28 23.64,28 23.75,28.12
DP
  Top 0.15: D3.3 21.91,27.9 22.26,28.25 22.26,28.96 J4.B6 22.25,29.77 22.41,29.93 23.15,29.93 23.25,29.84 23.25,29.83 J4.A6
EPD_3V3  (via drill 0.2)
  Top 0.15: Q1.3 12.6,30.11 v12.61,30.1 | v14.86,26.54 14.86,23.96 L5.2
  Top 0.3: J1.16 J1.15 10.65,16.23 EPD_C5.2 11.99,15.7 12.22,15.47 v13.88,15.47 | v14.86,22.1 14.86,23.07 | 14.86,23.07 14.86,23.93 L5.2 | C1-EP-DR.1 15.57,23.07 14.86,23.07
  Route15 0.3: v13.88,15.47 14.24,15.47 14.72,15.95 14.86,16.09 v14.86,22.1
  Bottom 0.15: v12.61,30.1 14.86,27.84 v14.86,26.54
EPD_BUSY  (via drill 0.2 pad 0.5)
  Top 0.15: J1.9 10.66,19.29 v14.09,19.29 | U1.P$AD12 27.93,24.21 v27.53,24.61
  Bottom 0.15: v14.09,19.29 18.27,19.29 19.37,20.39 23.63,24.65 24.28,24.65 24.29,24.65 25.02,25.37 25.05,25.4 27.09,25.4 27.53,24.96 v27.53,24.61
EPD_CS  (via drill 0.2)
  Top 0.15: v12.92,17.66 12.84,17.75 J1.12
  Bottom 0.15: U1.P$K2 30.46,19.11 30.46,15.94 28.31,13.8 27.94,13.43 27.76,13.43 27.25,12.91 27.13,12.91 22.76,12.91 19.72,15.96 15.4,15.96 13.69,17.66 v12.92,17.66
  other vias: 30.43,19.14
EPD_DC  (via drill 0.15 pad 0.3, 0.2)
  Top 0.203: U1.P$AD10 29,23.46 29,24.33 27.9,25.43 v27.77,25.43 | v11.7,18.25 J1.11
  Bottom 0.203: v27.77,25.43 27.47,25.73 24.65,25.73 23.89,24.96 23.31,24.96 18.17,19.82 18.14,19.8 12.59,19.8 11.7,18.91 v11.7,18.25
EPD_RST  (via drill 0.2, 0.2 pad 0.5)
  Top 0.15: J1.10 13.36,18.75 v13.53,18.57 | v26.21,23.47 26.6,23.86 v26.6,24.26 26.55,24.31
  Bottom 0.15: v13.53,18.57 13.77,18.81 18.02,18.81 18.31,18.81 23.7,24.19 25.81,24.19 25.91,24.29 26.57,24.29 v26.6,24.26 | U1.P$AC11 28.18,22.22 27.91,21.95 27.48,21.95 27.38,22.06 26.36,23.07 26.36,23.41 26.3,23.47 v26.21,23.47
  other vias: 28.18,22.39
GDR  (via drill 0.2)
  Top 0.15: R2_EP_DR.2 Q3.1 11.12,28.34 11.51,27.95 11.58,27.88 v11.58,26.8 | v11.61,25.19 11.61,22.75 11.49,22.63 10.74,22.63 J1.2
  Bottom 0.15: v11.58,26.8 11.58,25.22 v11.61,25.19
GND  (via drill 0.15 pad 0.15, 0.15 pad 0.5, 0.2, 0.2 pad 0.15, 0.2 pad 0.5)
  Top 0.15: IC9.B1 IC9.C1 IC9.C2 IC9.C3 17.49,13.09 v17.56,13.16 | C31.2 27.81,3.88 v27.99,4.06 | v25.4,4.34 25.37,4.31 SW_ENT.1 | J1.MP1 7.92,24.04 v6.6,25.36 5.92,25.36 TP_BAT_GND.TP | C15.2 21.27,17.21 C11.2 21.53,16.94 21.53,16.46 21.6,16.39 21.79,16.39 22.56,16.39 C1.2 | U1.P$84 U1.P$74 U1.P$75 | IC3.9 17.08,7.26 v16.57,7.77 | C19.2 16.69,5.42 v16.67,5.4
  Top 0.3: 35.37,18.11 C17.1 | C25.2 21.21,12.2 v21.9,12.2
  Route2 0.3: v21.9,12.2 21.3,12.8 20.59,12.8 20.45,12.93 X1.2
  other vias: 20.45,13.81 24.93,18.14 24.59,14.77 25.68,14.88 26.59,14.96 26.96,23.49 21.27,17.83 21.6,15.26 29.48,17.84 29.18,16.89 24.93,24.73
  pour Top: 36.45,0.01 39.59,-0.01 41.09,0.35 42.13,0.72 43.12,1.78 43.12,1.78 43.13,1.79 43.14,1.8 43.14,1.8 43.67,2.09 44.17,2.45 44.61,2.87 45,3.34 45.33,3.86 45.59,4.41 45.78,4.99 45.9,5.6 45.94,6.21 45.99,28.31 45.79,29.39 45.65,30.15 45.41,30.88 45.09,31.58 44.69,32.23 44.22,32.83 43.67,33.37 43.07,33.84 42.41,34.24 41.71,34.55 40.98,34.78 40.23,34.91 39.46,34.96 16.41,34.97 6.37,34.94 5.56,34.79 4.82,34.65 4.11,34.42 3.43,34.11 2.8,33.73 2.21,33.27 1.68,32.74 1.22,32.15 0.83,31.52 0.52,30.84 0.29,30.13 0.14,29.4 0.09,28.66 0.02,24.49 6.98,24.42 7,24.42 7,24.42 7,24.42 7.01,24.4 7.02,24.39 7.02,24.39 7.02,24.39 7.02,24.38 7.04,10.62 7.04,10.62 7.04,10.61 7.04,10.59 7.04,10.59 7.04,10.59 7.03,10.58 7.01,10.57 7.01,10.57 7.01,10.57 7,10.57 6.98,10.57 6.98,10.57 0.06,10.62 0.06,6.68 0.08,5.94 0.18,5.2 0.37,4.49 0.63,3.79 0.98,3.14 1.4,2.52 1.88,1.96 2.43,1.46 3.03,1.03 3.68,0.67 4.37,0.38 5.08,0.18 5.81,0.06 6.56,0.02 9.55,0.06 9.59,1.81 9.59,1.82 9.59,1.82 9.59,1.82 9.6,1.83 9.61,1.85 9.61,1.85 9.61,1.85 9.62,1.85 14.38,1.81 14.4,1.81 14.4,1.81 14.4,1.81 14.41,1.8 14.42,1.79 14.42,1.79 14.42,1.79 14.42,1.77 14.44,0.04 20.55,0.04 20.57,1.78 20.57,1.78 20.57,1.79 20.57,1.81 20.57,1.81 20.57,1.81 20.58,1.82 20.59,1.83 20.59,1.83 20.59,1.83 20.6,1.83 20.62,1.83 20.62,1.83 25.38,1.78 25.4,1.78 25.4,1.78 25.4,1.78 25.41,1.77 25.42,1.76 25.42,1.76 25.42,1.76 25.42,1.74 25.43,0.06 31.54,0.09 31.53,1.73 31.53,1.73 31.53,1.74 31.53,1.76 31.53,1.76 31.53,1.76 31.54,1.77 31.55,1.78 31.55,1.78 31.55,1.78 31.57,1.78 31.58,1.78 31.58,1.78 36.39,1.8 36.41,1.8 36.41,1.8 36.41,1.8 36.42,1.78 36.43,1.77 36.43,1.77 36.43,1.77 36.43,1.76
  pour Route2: 9.61,1.86 9.63,1.86 14.41,1.86 14.44,1.84 14.44,0.05 20.55,0.09 20.58,1.81 20.58,1.83 20.58,1.83 20.58,1.83 20.59,1.84 20.6,1.85 20.6,1.85 20.6,1.85 20.62,1.85 25.4,1.82 25.42,1.82 25.42,1.82 25.42,1.82 25.43,1.81 25.44,1.8 25.44,1.8 25.44,1.8 25.44,1.78 25.44,0.06 31.53,0.03 31.58,1.8 31.58,1.81 31.58,1.81 31.58,1.81 31.59,1.82 31.6,1.83 31.6,1.83 31.6,1.84 31.62,1.83 36.39,1.86 36.39,1.86 36.4,1.86 36.42,1.86 36.42,1.86 36.42,1.86 36.43,1.85 36.44,1.84 36.44,1.84 36.44,1.84 36.44,1.83 36.44,1.81 36.44,1.81 36.44,0.06 40.38,0.18 41.14,0.33 41.87,0.57 42.58,0.9 43.24,1.31 43.84,1.79 44.39,2.34 44.86,2.96 45.26,3.63 45.57,4.33 45.8,5.08 45.93,5.84 45.98,6.61 45.94,28.61 45.87,29.38 45.7,30.13 45.46,30.87 45.12,31.56 44.71,32.22 44.22,32.81 43.67,33.35 43.05,33.82 42.39,34.21 41.68,34.52 40.94,34.75 40.18,34.89 39.41,34.93 6.46,34.96 5.72,34.93 4.99,34.82 4.27,34.62 3.59,34.34 2.94,33.97 2.34,33.54 1.8,33.04 1.32,32.47 0.91,31.85 0.58,31.19 0.32,30.5 0.15,29.78 0.07,29.04 0.06,24.46 7,24.44 7.02,24.44 7.02,24.44 7.02,24.44 7.03,24.43 7.04,24.42 7.04,24.42 7.04,24.42 7.04,24.4 7.04,10.58 7.04,10.56 7.04,10.56 7.04,10.56 7.03,10.55 7.02,10.54 7.02,10.54 7.02,10.54 7,10.54 0.01,10.5 0.04,7.18 0.04,7.18 0.04,7.16 0.04,7.15 0.03,7.15 0,6.39 0.05,5.62 0.2,4.86 0.44,4.13 0.76,3.43 1.17,2.77 1.65,2.17 2.19,1.63 2.8,1.15 3.47,0.76 4.17,0.44 4.91,0.21 5.67,0.08 6.44,0.03 9.56,0.03 9.59,1.83 9.59,1.84 9.59,1.84 9.59,1.84 9.6,1.85 9.61,1.86 9.61,1.86
  pour Bottom: 36.39,1.78 36.51,-0.03 40.07,0.04 40.87,0.22 41.64,0.49 42.38,0.85 43.06,1.29 43.7,1.81 44.26,2.4 44.76,3.05 45.17,3.76 45.5,4.51 45.74,5.29 45.89,6.1 45.94,6.91 45.98,28.18 45.97,28.92 45.87,29.67 45.69,30.39 45.43,31.09 45.08,31.75 44.67,32.37 44.18,32.94 43.64,33.45 43.03,33.89 42.39,34.26 41.7,34.56 40.98,34.77 40.25,34.9 39.5,34.94 6.81,34.97 6,34.92 5.19,34.78 4.42,34.54 3.67,34.21 2.97,33.79 2.33,33.29 1.75,32.72 1.25,32.08 0.82,31.39 0.48,30.65 0.23,29.87 0.08,29.07 0.02,28.26 -0.01,24.46 6.97,24.41 6.98,24.41 6.98,24.41 6.98,24.41 6.99,24.4 7,24.39 7,24.39 7,24.39 7,24.37 7.08,10.63 7.08,10.61 7.08,10.61 7.08,10.61 7.07,10.6 7.06,10.59 7.06,10.59 7.06,10.59 7.04,10.59 0.03,10.52 0.03,6.17 0.1,5.42 0.26,4.68 0.51,3.96 0.84,3.28 1.24,2.64 1.72,2.06 2.27,1.54 2.88,1.08 3.53,0.7 4.23,0.4 4.95,0.19 5.7,0.06 6.45,0.02 9.57,0.04 9.57,1.78 9.57,1.78 9.57,1.79 9.57,1.81 9.57,1.81 9.57,1.81 9.58,1.82 9.59,1.83 9.59,1.83 9.59,1.83 9.61,1.83 9.62,1.83 9.62,1.83 14.4,1.82 14.4,1.82 14.42,1.82 14.43,1.82 14.43,1.82 14.43,1.82 14.44,1.81 14.45,1.8 14.45,1.8 14.45,1.8 14.45,1.78 14.45,1.77 14.45,1.77 14.42,0.07 20.55,0.07 20.55,1.76 20.55,1.77 20.55,1.77 20.55,1.77 20.56,1.78 20.57,1.8 20.57,1.8 20.57,1.8 20.59,1.8 25.37,1.83 25.37,1.83 25.38,1.83 25.4,1.83 25.4,1.83 25.4,1.83 25.41,1.82 25.42,1.81 25.42,1.81 25.42,1.81 25.42,1.79 25.42,1.78 25.42,1.78 25.42,0.03 31.57,0.04 31.56,1.75 31.56,1.75 31.56,1.77 31.56,1.79 31.56,1.79 31.56,1.79 31.57,1.8 31.58,1.81 31.58,1.81 31.58,1.81 31.6,1.81 31.61,1.81 31.61,1.81 36.35,1.82 36.37,1.82 36.37,1.82 36.37,1.82 36.38,1.81 36.39,1.8 36.39,1.8 36.39,1.8
HAPTIC_EN  (via drill 0.2)
  Top 0.15: IC2.A1 35.63,11.09 35.88,11.34 36.73,12.19 36.73,13.58 36.73,17.57 35.88,18.41 35.36,18.93 v35.07,18.93 | v31.7,20.88 U1.P$U1
  Bottom 0.15: v35.07,18.93 33.64,18.93 v31.7,20.88
IMU_INT1  (via drill 0.2)
  Top 0.15: U1.P$N1 31.57,19.89 v32.13,19.32 | v25.25,9.23 19.69,9.23 19.52,9.06 19.36,8.9 18.85,8.9 18.52,8.56 IC3.5
  Bottom 0.15: v32.13,19.32 34.34,17.12 34.34,13.96 30.04,9.66 26.97,9.66 26.54,9.23 v25.25,9.23
IMU_INT2  (via drill 0.2)
  Top 0.15: v19.53,9.62 19.23,9.31 18.95,9.31 18.5,9.31 18.28,9.09 18.02,8.83 IC3.6
  Bottom 0.15: U1.P$P2 30.47,20.19 30.78,20.19 31.44,19.52 31.44,14.97 30.13,13.66 30.08,13.6 29.96,13.6 26.36,10.01 21.87,10.01 21.35,10.01 20.85,9.51 19.64,9.51 v19.53,9.62
  other vias: 30.43,20.14
LX1
  Top 0.15: IC9.B2 IC9.B3 17.09,13.01 17.08,13.02 16.92,13.18 16.72,13.18 16.63,13.27 L7.1
LX2
  Top 0.15: IC9.D2 IC9.D3 17.89,12.81 18.11,13.03 18.52,13.03 18.62,13.12 18.69,13.19 L7.2
MOSI  (via drill 0.2)
  Top 0.15: J1.14 15.31,16.75 v15.39,16.67 | v25.95,13.33 27.49,14.87 v27.49,15.5
  Bottom 0.15: v15.39,16.67 15.79,16.27 17.21,16.27 20.29,16.27 21.08,15.48 21.08,15.14 21.63,14.6 21.97,14.6 23.24,13.33 v25.95,13.33 | v27.49,15.5 27.49,16.7 U1.P$B13
  other vias: 27.68,16.89
N$1
  Top 0.15: L2.2 30.02,14.97 L3.1
N$2
  Top 0.15: L2.1 30.05,16.76 U1.P$B3
N$3  (via drill 0.2)
  Top 0.15: U1.P$E24 24.37,17.83 v23.7,17.83 C15.1 22.27,18.24 21.95,18.56 C16.1 C10.1 | L3.2 28.93,15.5 | U1.P$B5 29.68,16.6 29.35,16.28 28.96,15.88 L3.2 | L3.2 v28.34,15.48 v28.33,15.47
  Bottom 0.15: v28.33,15.47 27.81,14.95 26.59,14.95 v23.7,17.83
N$4
  Top 0.15: C13.1 26.43,15.63 U1.P$A18
N$5
  Top 0.15: L1.1 22.32,19.26 | 22.32,19.26 C3.2 | U1.P$H23 24.63,18.34 24.26,18.34 23.98,18.34 23.07,19.25 23.06,19.26 22.32,19.26
N$6  (via drill 0.2)
  Top 0.15: C22.2 C4.2 | C22.2 | L1.2 C4.2 | C4.2 22.9,20.5 v22.92,20.52 | v40.73,26.91 43.47,26.91 ANT1.1
  Bottom 0.15: v22.92,20.52 22.92,22.86 23.95,23.88 27.69,23.88 28.57,24.75 32.09,24.75 33.86,26.52 34.25,26.91 v40.73,26.91
N$7
  Top 0.15: IC1.D1 16.87,3.6 R9.2
N$13
  Top 0.127: IC3.1 19.43,6.36 R3.2
N$26
  Top 0.15: SJ1.2 6.16,31.11 6.65,30.62 6.68,30.59 6.68,30.22 6.92,29.98 R_TYPE_SEL.2 R1_EP_DR.1
N$31
  Top 0.15: D2.1 3.26,5.79 3.42,5.95 3.45,5.98 3.45,9.13 3.59,9.28 D4.2 8.26,9.28 8.76,9.78 8.86,9.88 8.86,24.53 8.74,24.65 7.95,24.65 7.74,24.65 7.26,25.12 7.26,26.37 7.3,26.41 7.36,26.47 C2-EP-DR.1
N$32
  Top 0.15: 8.58,25.47 8.88,25.77 9.35,26.24 Q3.3 12.56,26.24 L5.1 | C2-EP-DR.2 8.58,25.47 | 8.58,25.47 9.25,24.8 9.25,7.93 9.16,7.85 | 9.16,7.85 | 9.16,7.85 9.09,7.77 8.43,7.11 8.43,5.29 7.37,4.24 D5.2
N$38
  Top 0.15: J1.4 11.89,21.75 EPD_C2.2
N$39
  Top 0.15: J1.5 11.15,21.25 11.31,21.09 11.39,21.01 11.39,20.73 11.5,20.62 EPD_C1.2
N$41
  Top 0.15: EPD_C6.2 10.64,14.74 J1.18
N$42
  Top 0.15: J1.19 11.22,14.25 11.35,14.12 EPD_C7.2
N$44
  Top 0.15: J1.21 11.27,13.25 11.37,13.25 11.89,12.74 14.22,12.74 EPD_C9.2
N$45
  Top 0.15: J1.22 11.16,12.75 11.31,12.59 11.79,12.12 EPD_C10.2
N$47
  Top 0.15: J1.24 11.26,11.75 11.44,11.57 11.58,11.43 11.58,10.52 11.84,10.26 11.89,10.26 12.38,10.26 EPD_C12.2
N$63
  Top 0.254: C28.2 IC2.A2
N$75
  Top 0.15: J4.A5 24.28,28.95 24.28,27.82 24.45,27.65 R1_USB.2
N$76
  Top 0.15: J4.B5 21.25,27.88 21.25,27.87 21.01,27.63 R2_USB.1
OUT+
  Top 0.15: TP_OP.TP IC2.A3
OUT-
  Top 0.15: IC2.C3 37.37,7.72 38,7.08 38.05,7.04 38.05,6.29 38.05,6.03 38.36,5.71 39.57,5.71 TP_ON.TP
P0.00/XL1@D2
  Top 0.15: U1.P$D2 30.49,17.7 32.95,17.7 X2.1 33.41,17.59 33.59,17.77 34.51,17.77 C17.2
P0.01/XL2@F2
  Top 0.15: X2.2 32.97,20.18 33.09,20.18 | U1.P$F2 30.53,18.03 31.15,18.03 32,18.88 32.25,18.88 32.65,19.28 32.65,19.82 33.02,20.18 33.09,20.18 | C18.2 34.83,20.18 33.09,20.18
P0.13  (via drill 0.2)
  Top 0.15: C30.1 11.99,6.99 v12.16,7.16 | 9.34,5.87 R5.1 9.25,4.77 9.64,4.38 9.73,4.29 SW_UP.2 10.52,5.39 10.67,5.54 10.71,5.58 C30.1 | C30.1 | U1.P$AD8 28.93,22.95 29.34,23.36 v29.34,25.19 | v18.08,20.48 18.08,18.38 v18.01,18.31 | v16.96,16.68 15.96,16.68 15.7,16.42 15.38,16.1 v15.38,15.17
  Bottom 0.15: v29.34,25.19 29.08,25.19 28.22,26.05 23.79,26.05 23.04,25.31 22.91,25.31 v18.08,20.48 | v18.01,18.31 16.96,17.26 v16.96,16.68 | v15.38,15.17 14.57,14.37 14.57,9.32 12.41,7.16 v12.16,7.16
P0.14  (via drill 0.2)
  Top 0.15: C31.1 26.8,3.04 | C31.1 26.81,1.73 R8.1 | C31.1 26.81,5.04 | 26.81,5.04 26.81,5.11 26.14,5.79 22.23,5.79 22.21,5.76 21.56,5.11 SW_ENT.2 | v34.37,19.45 34.37,18.6 v34.27,18.5 | v28.66,4.92 26.93,4.92 26.81,5.04
  Bottom 0.15: U1.P$AC9 31.44,22.39 v34.37,19.45 | v34.27,18.5 34.27,17.58 34.62,17.24 34.62,13.55 34.58,13.51 30.16,9.09 30.16,5.09 29.99,4.92 v28.66,4.92
  other vias: 28.68,22.39
P1.01  (via drill 0.2, 0.2 pad 0.5)
  Top 0.15: Q1.1 15.7,31.77 15.77,31.85 15.79,31.87 R_PWR_EPD.1 16.49,32.39 17.27,31.61 17.27,29.81 17.27,29.73 17.72,29.28 17.93,29.07 17.93,27.86 17.93,24.99 18.68,24.23 18.68,22.93 19.83,21.79 23.45,21.79 v23.69,22.03
  Top 0.3: 14.72,31.75 Q1.1
  Bottom 0.15: U1.P$Y23 24.89,21.67 24.01,21.67 23.69,21.99 v23.69,22.03
  other vias: 24.93,21.64
P1.02  (via drill 0.2, 0.2 pad 0.5)
  Top 0.15: C29.1 32.68,6.15 R7.1 | C29.1 SW_DN.2 | C29.1 32.22,6.13 v31.49,6.85 | v30.63,8.83 26.63,12.84 19.99,12.84 | 19.99,12.84 | 19.99,12.84 19.65,13.18 19.65,16.85 19.65,19.1 v20.33,19.78
  Bottom 0.15: v20.33,19.78 22.83,19.78 24.43,21.38 U1.P$W24 | v30.63,8.83 30.63,7.71 v31.49,6.85
  other vias: 24.43,21.39
PMIC_INT  (via drill 0.2)
  Top 0.15: IC1.A1 21.39,6.27 v21.39,7.07
  Bottom 0.15: U1.P$T2 31.05,20.64 31.73,19.95 31.73,14.85 30.57,13.7 26.57,9.69 22.44,9.69 21.38,8.63 21.38,8.16 21.38,7.08 v21.39,7.07
  other vias: 30.43,20.64
PREVGH  (via drill 0.2)
  Top 0.15: D5.1 6.42,8.49 v6.19,8.49 | v9.82,13.72 10.6,13.72 J1.20 11.32,13.75 11.48,13.59 11.63,13.44 11.64,13.43 EPD_C8.2
  Bottom 0.15: v6.19,8.49 5.67,9.01 5.67,9.28 6.06,9.67 6.99,9.67 7.81,10.49 7.81,13.33 8.21,13.72 v9.82,13.72
PREVGL  (via drill 0.2)
  Top 0.15: EPD_C11.2 12.1,11.14 11.86,11.38 11.86,11.61 11.46,12.01 11.21,12.25 J1.23 10.27,12.25 9.98,11.96 9.75,11.74 v9.75,10.2 | D2.2 2.94,10.11 5.19,10.11 8.09,10.11 v8.1,10.09
  Bottom 0.15: v8.1,10.09 9.64,10.09 v9.75,10.2
RESE  (via drill 0.2)
  Top 0.15: R1_EP_DR.2 9.32,29.41 Q3.2 8.78,28.34 8.46,28.02 8.46,27.33 8.47,27.32 8.83,26.96 8.83,26.91 8.83,26.57 v8.96,26.44 | J1.3 10.29,22.25 9.73,22.81 v9.73,24.81
  Bottom 0.15: v9.73,24.81 8.96,25.59 v8.96,26.44
RESET  (via drill 0.2)
  Top 0.15: v40,17.5 40,17.28 TP_RESET.TP
  Bottom 0.15: J2.6 39.88,21.05 39.16,20.33 | U1.P$AC13 28.38,23.1 28.68,23.39 31.96,23.39 34.46,20.89 38.07,20.89 38.6,20.89 39.16,20.33 | v40,17.5 39.16,18.34 39.16,19.84 39.16,20.33
  other vias: 27.68,22.39 41.38,22.55
SCK  (via drill 0.2)
  Top 0.15: J1.13 18.76,17.25 v18.82,17.31 | v26.96,13.76 27.93,14.72 U1.P$A12
  Bottom 0.15: v18.82,17.31 20.19,17.31 23.26,14.23 23.3,14.23 23.77,13.76 26.92,13.76 v26.96,13.76
SCL  (via drill 0.2)
  Top 0.127: U3.7 41.47,12.79 41.36,12.91 40.12,12.91 v37.63,10.42 | R17.2 26.74,8.18 27.38,7.54 28.82,7.54 28.86,7.58
  Top 0.15: IC9.D1 17.89,11.05 17.87,11.03 17.81,10.97 R4.2 17.44,10.47 v17.24,10.27 | 28.86,7.58 TP_SCL.TP | IC1.B1 18.32,4.75 18.32,6.37 18.52,6.57 IC3.12 18.52,7.24 18.44,7.32 18.29,7.46 v18.27,7.46 | IC2.C1 29,7.72 TP_SCL.TP | v30.78,15.56 30.91,15.56 31.23,15.24 31.23,12.65 v29.52,10.95 | v28.24,10.22 27.76,9.74 27.76,9.18 27.76,8.75 TP_SCL.TP
  Top 0.2: R17.2 25.56,8.18 v24.96,7.58 | v19.03,4.79 18.99,4.75 18.32,4.75
  Bottom 0.15: U1.P$M2 30.43,19.55 30.75,19.22 30.75,16 30.74,15.98 30.74,15.6 v30.78,15.56 | v29.52,10.95 28.8,10.22 v28.24,10.22 | v18.27,7.46 17.99,7.74 17.99,9.11 17.56,9.54 17.33,9.54 17.24,9.62 v17.24,10.27
  Bottom 0.2: v24.96,7.58 24.96,7.42 23.91,6.37 23.06,5.52 21.18,5.52 21.15,5.52 20.47,4.84 20.42,4.79 v19.03,4.79
  Bottom 0.254: v37.63,10.42 35.63,8.42 IC2.C1
  other vias: 30.43,19.64 35.63,7.72
SDA  (via drill 0.2)
  Top 0.127: v30.8,5.76 27.33,5.76 26.82,6.27 26.76,6.33 24.73,6.33 23.36,7.7 23.36,7.72
  Top 0.15: IC9.E1 18.29,11.14 18.5,10.93 R2.2 18.97,10.47 v19.12,10.32 | TP_SDA.TP 23.36,7.72 R18.2 20.71,7.39 20.54,7.22 19.08,7.22 IC3.2 | v17.92,5.63 17.93,5.62 17.93,5.02 17.93,3.61 IC1.C1 | v28.72,13.2 29.56,12.36 30.08,12.36 30.2,12.36 v30.26,12.42 | v31.06,11.51 33.35,9.21 v33.35,9.13
  Top 0.254: v39.67,11.67 40.07,12.07 U3.8
  Bottom 0.127: v30.8,5.76 31.23,6.19 34.85,6.19 35.51,6.84 35.51,7.08
  Bottom 0.15: v17.92,5.63 19.92,5.63 20.16,5.87 20.16,6.14 IC3.2 19.3,7.26 19.67,7.63 19.67,8.61 19.17,9.12 19.12,9.17 v19.12,10.32 | U1.P$L1 31.14,19.17 31.14,18.93 31.14,15.83 31.16,15.81 31.16,15.09 30.49,14.42 29.52,14.42 28.72,13.62 v28.72,13.2 | v30.26,12.42 31.06,11.62 v31.06,11.51 | v33.35,9.13 34.72,7.76 35.4,7.08 35.51,7.08 36.67,7.08 36.86,7.26 36.86,7.42 36.86,7.49 IC2.B2
  Bottom 0.254: IC2.B2 39.59,11.67 v39.67,11.67
  other vias: 19.04,7.26 30.93,19.39 36.13,8.22
SWDCLK  (via drill 0.2)
  Top 0.15: v25.48,23.47 25.48,25.43 25.77,25.72 25.88,25.83 28.45,25.83 28.79,25.83 30.97,28.02 36.52,28.02 v37.04,27.5
  Top 0.3: TP_SWDCLK.TP 41.2,29.73 41.2,28.11 v41.48,27.83
  Bottom 0.15: U1.P$AA24 24.55,22.01 24.65,22.01 24.66,22.02 25.16,22.02 25.9,22.77 25.9,23.05 v25.48,23.47 | v37.04,27.5 38.01,27.5 38.25,27.26 40.07,27.26 40.42,27.61 40.64,27.83 v41.48,27.83 41.48,26.48 41.19,26.19 39.6,26.19 39.45,26.04 39.17,25.76 39.17,23.7 40.11,22.77 J2.4
  other vias: 40.11,22.55 24.43,21.89
SWDIO
  Top 0.15: U1.P$AC24 24.43,23.97 24.38,24.01 24.38,24.83 24.82,25.27 25.66,26.11 28.05,26.11 28.62,26.11 30.86,28.35 TP_SWDIO.TP 39.29,26.84 38.76,26.32 36.43,26.32 35.97,25.86 35.38,25.27 35.38,23.82 36.38,22.83 36.42,22.83 38,22.83 38.01,22.82 38.27,22.55 J2.2
SWO  (via drill 0.15 pad 0.3, 0.2)
  Top 0.15: v23.53,22.75 22.34,22.75 21.05,22.75 21.01,22.8 19.85,23.96 TP_SWO.TP
  Bottom 0.15: U1.P$AD22 25.43,22.72 25.21,22.5 23.78,22.5 v23.53,22.75
  other vias: 25.43,22.89
VBAT  (via drill 0.15 pad 0.15, 0.2)
  Top 0.15: TP_VBAT.TP 43.65,8.26 42.2,8.26 41.97,8.49 41.97,9.17 | 41.97,9.17 U3.3 | C27.1 41.6,8.04 | 41.6,8.04 41.6,8.79 41.97,9.17 | IC1.C2 17.92,2.57 17.62,2.27 17.14,1.78 C37.1 | v41.55,7.05 41.55,7.99 41.6,8.04
  Top 0.3: U3.3 U3.2
  Route15 0.15: IC1.C2 25.26,3.2 26.17,2.29 26.17,1 26.16,0.99 26.5,0.66 27.9,0.66 28.07,0.83 28.52,1.28 28.52,2.29 28.8,2.57 31.81,5.59 37.31,5.59 40.09,5.59 v41.55,7.05
  other vias: 17.92,3.2
VBUS  (via drill 0.2)
  Top 0.15: C38.1 18.72,2.61 IC1.A2 18.83,3.31 19.72,3.31 19.99,3.58 v19.99,3.77
  Top 0.3: U1.P$AD2 30.43,23.92 C21.1 31.75,25.31 v31.75,25.65 | C42.1 C43.1 30.76,31.61 v30.76,30.23 28.22,27.68 27.48,27.68 25.91,27.68 25.51,28.08 25.51,28.87 J4.A4_B9 25.4,29.54 25.33,29.61 25.31,29.61 25.16,29.76 25.16,30.05 25.05,30.16 24.81,30.4 21.85,30.4 21.53,30.4 21.45,30.32 20.6,29.47 J4.A9_B4 20.6,28.32 20.42,28.14 20.03,27.75 20.03,27.59 20.03,26.76 v20.23,26.57 | v22.95,23.31 22.95,24.27 D3.5
  Route15 0.3: v31.75,25.65 31.75,28.94 30.76,29.93 v30.76,30.23 | v19.99,3.77 22.95,6.72 22.95,22.31 | 22.95,22.31 v22.95,23.31 | 22.95,22.31 22.84,22.2 22.34,22.2 21.24,23.3 21.24,26.09 20.76,26.57 v20.23,26.57
VREG
  Top 0.15: IC9.A1 | IC1.B2 18.32,1.81 C39.1 17.97,1.8 17.02,0.85 17.01,0.86 15.55,0.86 15.52,0.86 15.12,1.25 15.12,4.67 15.3,4.86 15.3,6.92 15.3,7.58 15.26,7.63 14.96,7.92 TP_VREG.TP 13.99,7.99 14.85,7.99 | 16.68,10.45 C23.1
  Top 0.3: TP_VREG.TP 14.53,8.45 14.53,9.8 15.12,10.39 C24.2 15.77,10.43 C23.1 16.68,10.45 IC9.A1 IC9.A2 IC9.A3
XC1@B24
  Top 0.15: C1.1 24.16,16.62 U1.P$B24 | C1.1 23.29,16.61 | 20.45,15.71 20.45,15.53 | 20.45,15.53 X1.1 | C1.1 23.29,16.16 23.13,15.99 21.69,15.99 21.56,16.12 21.48,16.12 21.42,16.17 20.71,16.17 20.45,15.91 20.45,15.53
XC2@A23
  Top 0.15: X1.3 22.29,13.81 23.19,15.22 24.53,15.22 C2.1 24.59,15.47 24.74,15.62 24.93,15.81 U1.P$A23
(copper drawn outside any net)
  shapes: Bottom area x1, Route15 area x1, Route2 area x1, Top area x1